# Altium PCB PJ1301-001-A1.PcbDoc (part 3 of 4)
Units mm, origin at the board's own origin, x right, y up, seen from the top; angles counter-clockwise.
Board outline 163.83 x 187.81 mm, 4 copper layers (Top Layer, GND, POWER, Bottom Layer); 436 components, 348 nets, 1620 pads, 1368 vias.
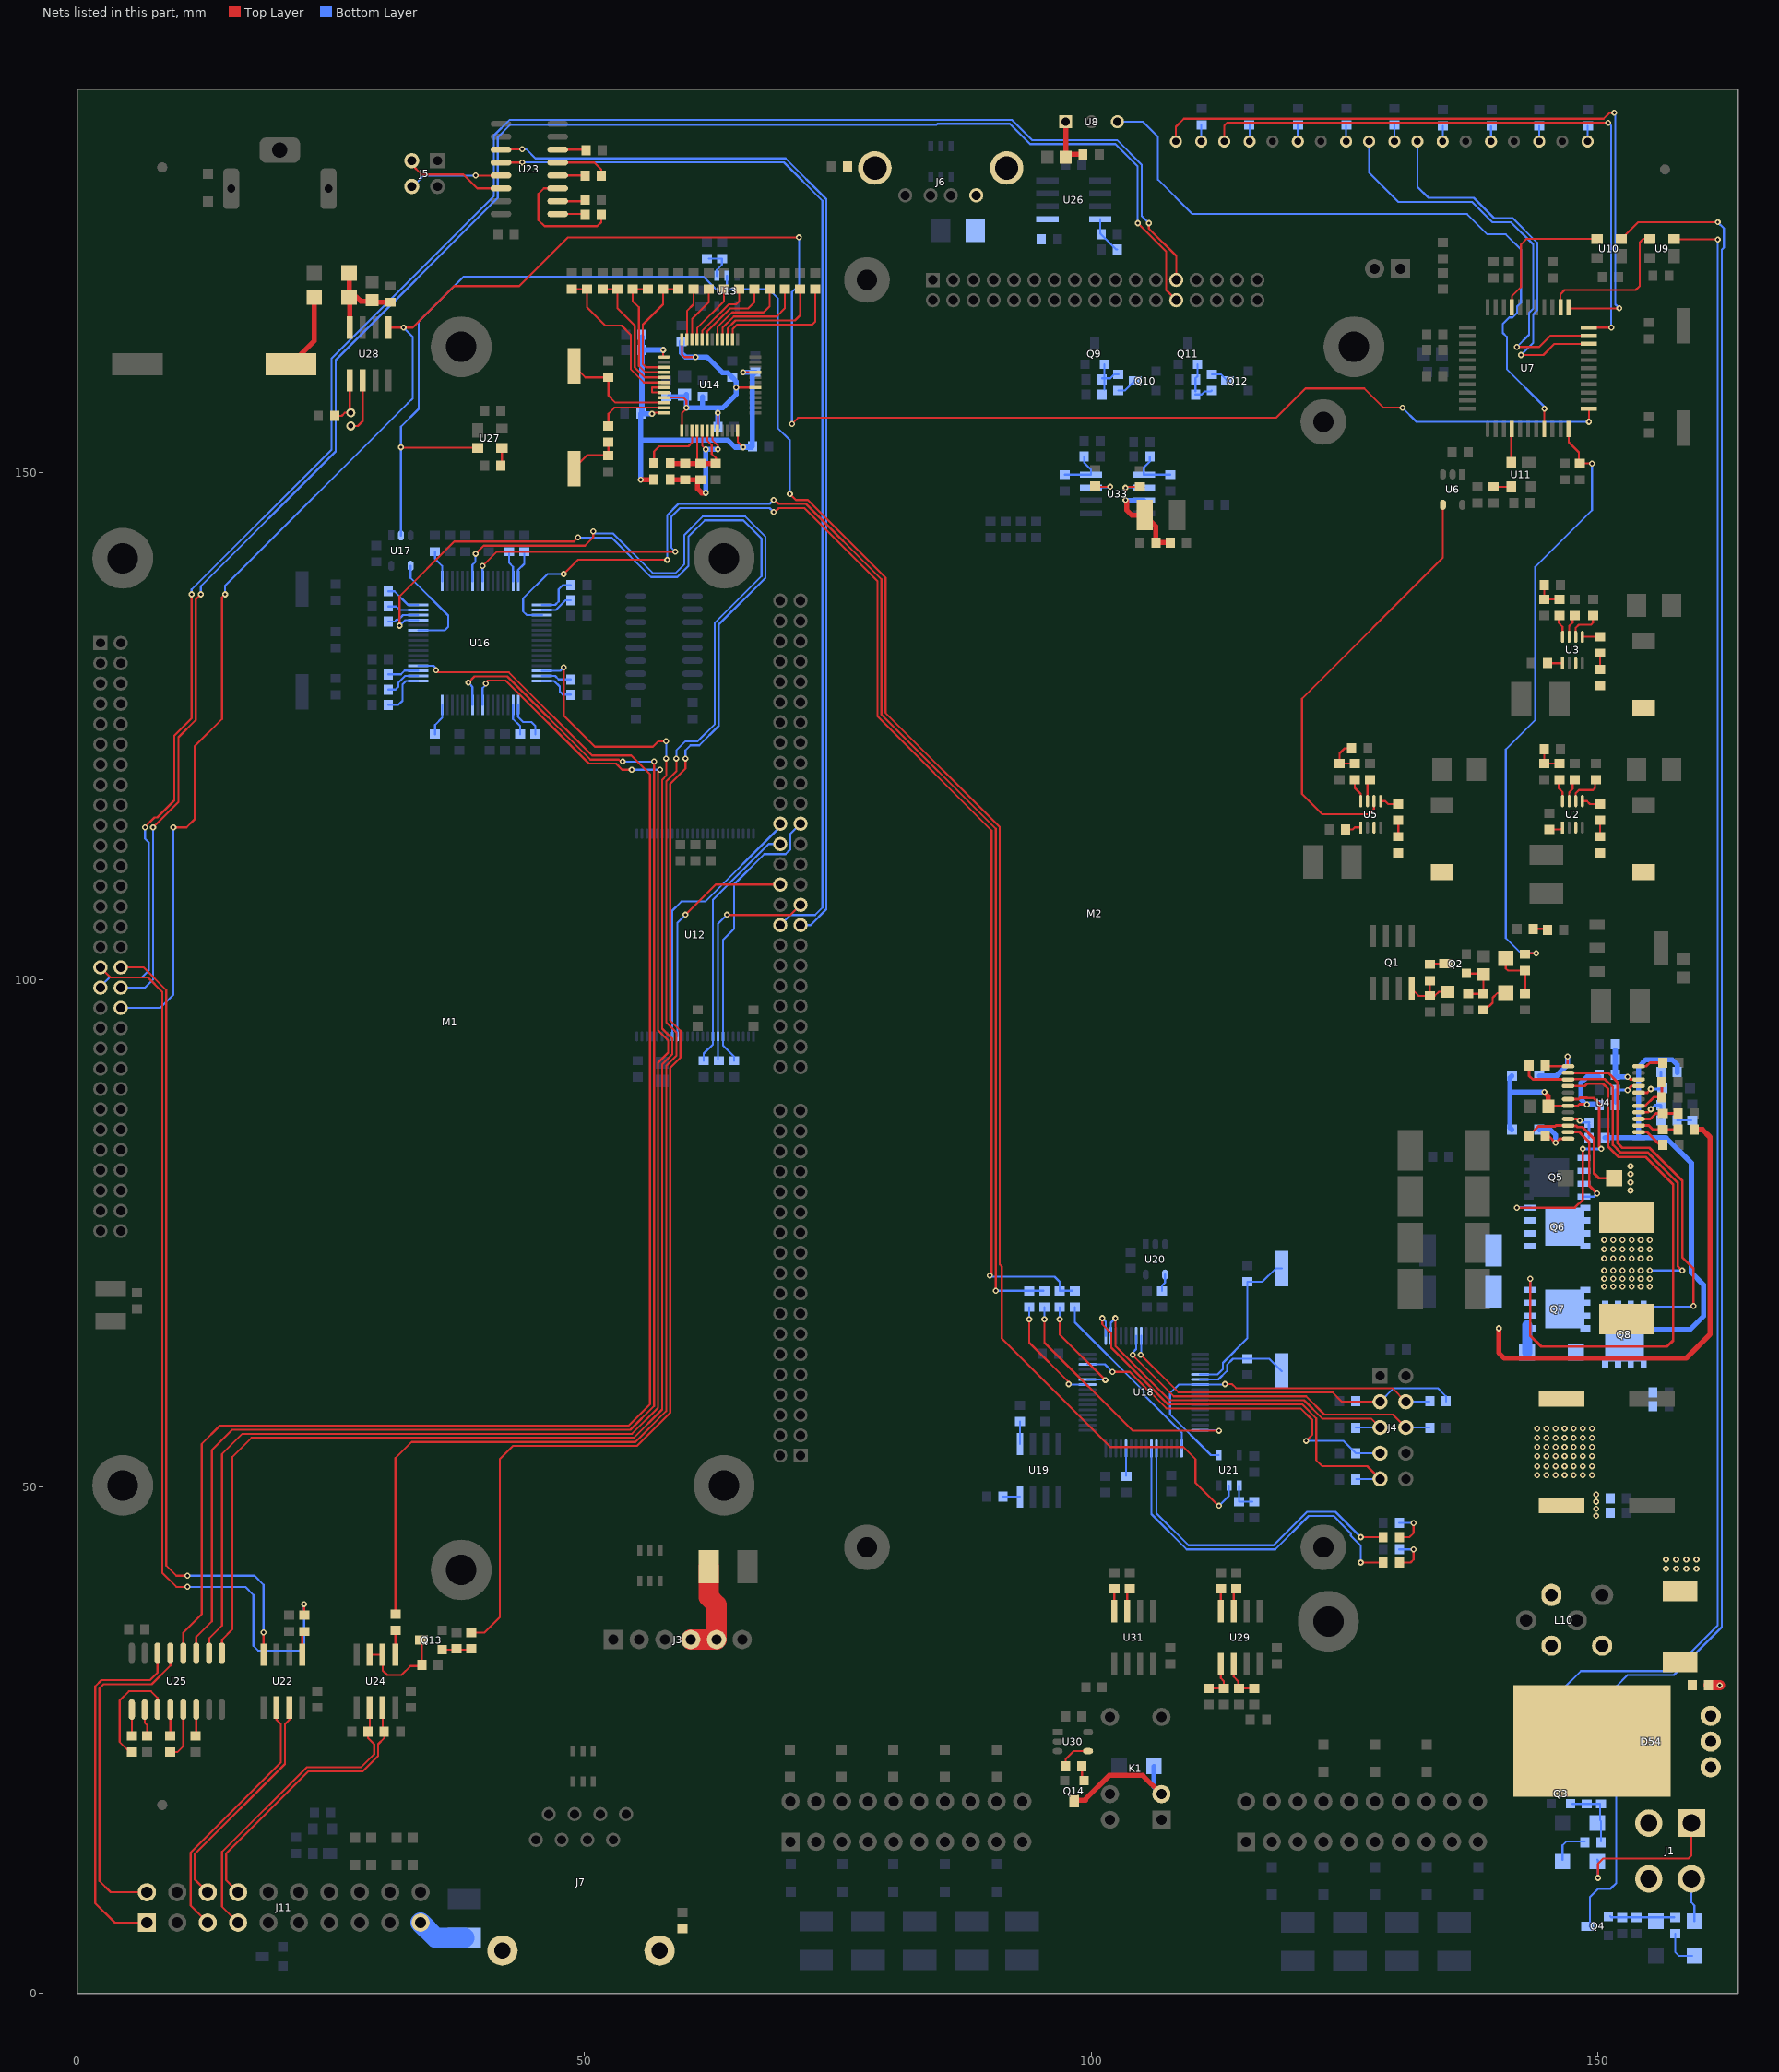
[diagram p5: the nets of this part, all layers, seen from the top]

## Via types
v1: diameter 0.6, hole 0.3, Top Layer to Bottom Layer, tented both sides, 1367 vias
v2: diameter 0.6, hole 0.3, Top Layer to Bottom Layer, 1 vias

## Nets (pads, with @x,y where several pads share a name; then routed paths per layer and width w, separated by ;. In a path a pad name is that pad's centre, name@x,y a point inside that pad or via, vN(x,y) a via of type N, cw(c..) or ccw(c..) an arc to the next point about the centre after c; other vN are vias at no path point) (continued)
I2C-SDA: M1.A38 U7.12 U28.5 | length 228
  Top Layer w0.2: v1(9.5,115) 10.8,115 11.6,115.8 11.6,123 14.3,125.7 14.3,137.7 v1(14.6,138) ; U28.5@30.705,164.3 33.1,164.3 37.2,168.4 43.6,168.4 48.4,173.2 v1(71.2,173.2) ; v1(70.5,154.8) 71.1,155.4 78,155.4 118.234,155.4 121.134,158.3 126.934,158.3 128.834,156.4 v1(130.7,156.4) ; v1(149.1,155) U7.12@149.1,156.3
  Bottom Layer w0.2: M1.A38@4.3,97.2 8.2,97.2 9.5,98.5 v1(9.5,115) ; v1(14.6,138) 14.6,138.834 32.617,156.851 ; v1(32.2,164.3) 33.1,163.4 33.1,157.3 32.634,156.834 ; v1(70.5,154.8) 70.5,167.8 71.2,168.5 v1(71.2,173.2) ; v1(130.7,156.4) 132.1,155 v1(149.1,155)
IGN: Q3.1 U9.2 | length 168.1
  Top Layer w0.2: U9.2@157.55,173 v1(161.8,173)
  Bottom Layer w0.2: Q3.1@146.535,20.732 146.535,30.035 148.3,31.8 157.3,31.8 161.8,36.3 v1(161.8,173)
IGN-SIG: U7.24 U9.3 | length 14.9
  Top Layer w0.2: U7.24@146.3,166.3 146.3,167.6 146.7,168 153.7,168 154.1,168.4 154.1,172.7 154.45,173.05 U9.3@155.1,173.05
INTVCC: C35.1 D8.1 D12.1 R32.1 R36.2 U4.19 | length 19.8
  Top Layer w0.2: C35.1@144.7,87.5 C35.1@144.75,87.55
  Top Layer w0.254: C35.1@145.15,87.55 U4.19@147.05,87.55 148,87.55 148.142,87.692 v1(148.9,87.692)
  Top Layer w0.508: v1(144.7,88.9) 144.7,88.857 145.1,88.457 C35.1@145.1,87.5
  Bottom Layer w0.5: D8.1@141.5,85.2 141.296,85.404 141.296,88.9 141.296,90.296 D12.1@141.5,90.5
  Bottom Layer w0.508: 141.296,88.9 v1(144.7,88.9) ; v1@148.8,87.7 148.3,88.2 148.3,89.8 148.9,90.4 R36.2@150.1,90.4 ; v1@148.9,87.7 R32.1@150,87.7
IR: U7.8 U8.3 | length 67.8
  Top Layer w0.2: U7.8@144.7,154.3 v1(144.7,156.3)
  Bottom Layer w0.2: U8.3@102.6,184.6 105.1,184.6 106.6,183.1 106.6,178.9 110,175.5 137.072,175.5 139.072,173.5 140.906,173.5 142.4,172.006 142.4,166.766 142,166.366 142,165.731 141.569,165.3 141.234,165.3 140.6,164.666 140.6,163.786 141,163.386 141,160.2 144.7,156.5 v1(144.7,156.3)
NAND-ALE: M1.B26 U12.17 | length 26.8
  Bottom Layer w0.2: U12.17@58.7,94.4 58.7,106.8 59.6,107.7 61.969,107.7 69.352,115.083 M1.B26@69.352,115.372
NAND-CE: M1.B24 R53.1 U12.9 | length 25.2
  Bottom Layer w0.2: R53.1@61.8,92 61.8,92.7 62.7,93.6 U12.9@62.7,94.4 62.7,107.866 68.206,113.372 M1.B24@69.352,113.372
NAND-CLE: M1.B20 U12.16 | length 22.9
  Top Layer w0.2: v1(60,106.4) 62.972,109.372 M1.B20@69.352,109.372
  Bottom Layer w0.2: U12.16@59.2,94.4 59.2,105.6 v1(60,106.4)
NAND-RDY: M1.B25 R55.1 U12.7 | length 28.2
  Bottom Layer w0.2: R55.1@64.8,92 64.8,92.4 63.7,93.5 U12.7@63.7,94.4 63.7,103.9 64.8,105 64.8,109.4 67.772,112.372 69.872,112.372 70.352,112.852 70.352,114.372 M1.B25@71.352,115.372
NAND-RE: M1.B17 R54.1 U12.8 | length 22.4
  Top Layer w0.2: v1(64.1,106.4) 64.128,106.372 70.352,106.372 M1.B17@71.352,107.372
  Bottom Layer w0.2: R54.1@63.2,92.1 U12.8@63.2,94.4 63.2,105.5 v1(64.1,106.4)
NetBT1_1: BT1.1 D28.2 | length 7.6
  Top Layer w0.5: BT1.1@21.1,160.7 23.4,163 D28.2@23.4,167.3
NetC1_1: C1.1 D1.2 J1.4 L10.2 | length 1.1
  Top Layer w1: C1.1@160.9,30.4 v1(162,30.4)
  other v1: 156.7,41.9 157.7,41.9 158.7,41.9 159.7,41.9 156.7,42.8 157.7,42.8 158.7,42.8 159.7,42.8
NetC1_2: C1.2 D1.1 D54.1 L10.1
NetC2_1: C2.1 Q1.4 R1.1 R3.2 | length 5.6
  Top Layer w0.2: Q1.4@131.605,99.1 132.305,98.4 R1.1@133.4,98.4 ; R3.2@133.4,99.9 R1.1@133.4,98.4 ; C2.1@135.2,98.8 134.3,98.8 133.9,98.4 R1.1@133.4,98.4
NetC11_2: C11.2 Q2.2 R5.1 R6.2 | length 5.1
  Top Layer w0.2: Q2.2@137,100.6 138.6,100.6 C11.2@138.7,100.5 R5.1@138.7,98.6 R6.2@137.2,98.6
NetC12_1: C12.1 D5.1 Q3.2 R7.1 R8.1 | length 6.3
  Bottom Layer w0.2: Q3.2@147.5,18.7 150.2,18.7 D5.1@150.2,17.071 ; R7.1@150.3,15 D5.1@150.3,16.971
NetC13_1: C13.1 D7.1 Q4.2 R9.1 R10.1 | length 6.3
  Bottom Layer w0.2: Q4.2@151.2,7.6 151.3,7.5 152.5,7.5 153.9,7.5 R9.1@157.5,7.5
NetC14_1: C14.1 L1.1 U2.3
NetC14_2: C14.2 R11.1 | length 1.6
  Top Layer w0.2: C14.2@150.2,114.1 R11.1@150.2,115.7
NetC17_2: C17.2 U2.1 | length 1.4
  Top Layer w0.2: C17.2@145.2,114.8 146.3,114.8 U2.1@146.5,115
NetC18_2: C18.2 U2.7 | length 2.2
  Top Layer w0.2: U2.7@147.15,117.6 147.15,118.45 147.5,118.8 C18.2@147.5,119.7
NetC24_1: C24.1 L2.1 U3.3
NetC24_2: C24.2 R17.1 | length 1.6
  Top Layer w0.2: C24.2@150.2,130.6 R17.1@150.2,132.2
NetC27_1: C27.1 D9.1 L3.1 Q5.1 Q5.2 Q5.3 Q6. Q6.5 Q6.6 Q6.7 Q6.8 U4.22 | length 13
  Top Layer w0.254: C27.1@143.2,84.6 144.119,85.519 145.782,85.519 145.863,85.6 U4.22@147.05,85.6 147.092,85.558 147.858,85.558 147.971,85.446 148.454,85.446 149.581,84.319 149.581,80.9 150.081,80.4 D9.1@151.6,80.4
  other v1: 150.6,72.5 151.5,72.5 152.4,72.5 153.3,72.5 154.2,72.5 155.1,72.5 150.6,73.4 151.5,73.4 152.4,73.4 153.3,73.4 154.2,73.4 155.1,73.4 150.6,74.3 151.5,74.3 152.4,74.3 153.3,74.3 154.2,74.3 155.1,74.3 153.2,79.2 153.2,80 153.2,80.8 153.2,81.6
NetC27_2: C27.2 D8.2 U4.24 | length 5.3
  Top Layer w0.254: C27.2@144.8,84.6 145.1,84.6 v1(145.8,83.9) 146.2,84.3 U4.24@147.05,84.3
  Bottom Layer w0.5: D8.2@144.2,85.2 145.3,85.2 145.8,84.7 v1(145.8,83.9)
NetC28_2: C28.2 U4.2 | length 2.9
  Top Layer w0.254: U4.2@154,84.95 154.85,84.95 156,83.8 C28.2@156.4,83.8
NetC29_2: C29.2 U3.1 | length 1.5
  Top Layer w0.2: C29.2@145,131.2 U3.1@146.5,131.2
NetC30_2: C30.2 U3.7 | length 2.2
  Top Layer w0.2: U3.7@147.15,133.8 147.15,134.85 147.5,135.2 C30.2@147.5,135.9
NetC31_1: C31.1 R24.2 U4.4 | length 4
  Top Layer w0.254: U4.4@154,86.25 155.15,86.25 155.7,86.8 C31.1@156.4,86.8 R24.2@157.8,86.8
NetC31_2: C31.2 R22.2 U4.3 | length 4
  Top Layer w0.254: U4.3@154,85.6 155,85.6 155.4,85.2 C31.2@156.4,85.2 R22.2@157.8,85.2
NetC32_2: C32.2 R25.1 | length 1.4
  Bottom Layer w0.2: R25.1@157.8,86.1 C32.2@159.2,86.1
NetC33_2: C33.2 R23.1 U4.21 | length 3.5
  Top Layer w0.254: U4.21@147.05,86.25 148.05,86.25 v1(148.2,86.1)
  Bottom Layer w0.254: v1(148.2,86.1) 148.4,85.9 C33.2@149.1,85.9 ; R23.1@149.1,84.4 C33.2@149.1,85.7
NetC34_1: C34.1 R25.2 U4.5 | length 3.7
  Top Layer w0.254: U4.5@154,86.9 154.9,86.9 v1(155.2,87.2)
  Bottom Layer w0.254: v1(155.2,87.2) 155.6,87.6 C34.1@156.2,87.6 R25.2@156.2,86.4
NetC36_1: C36.1 L4.1 U5.3
NetC36_2: C36.2 R28.1 | length 1.6
  Top Layer w0.2: C36.2@130.3,114.1 R28.1@130.3,115.7
NetC39_2: C39.2 U5.1 | length 1.6
  Top Layer w0.2: C39.2@125.1,114.8 125.8,114.8 126,115 U5.1@126.6,115
NetC40_1: C40.1 D11.2 L3.2 Q7. Q7.5 Q7.6 Q7.7 Q7.8 Q8.1 Q8.2 Q8.3 U4.15 | length 35.4
  Top Layer w0.254: C40.1@143.2,91.5 143.2,90.5 143.55,90.15 U4.15@147.05,90.15 147.081,90.181 150.661,90.181 151.454,89.388 151.454,83.688 152.188,82.954 154.888,82.954 157.854,79.988 157.854,71.746 v1(158.3,71.3)
  Bottom Layer w0.254: v1(155.1,71.3) v1(158.3,71.3)
  other v1: 150.6,69.7 151.5,69.7 152.4,69.7 153.3,69.7 154.2,69.7 155.1,69.7 150.6,70.5 151.5,70.5 152.4,70.5 153.3,70.5 154.2,70.5 155.1,70.5 150.6,71.3 151.5,71.3 152.4,71.3 153.3,71.3 154.2,71.3
NetC40_2: C40.2 D12.2 U4.13 | length 7.3
  Top Layer w0.254: C40.2@144.8,91.5 144.85,91.45 U4.13@147.05,91.45 147,91.5 v1(147,92.4)
  Bottom Layer w0.5: D12.2@144.2,90.5 145.9,90.5 147,91.6 v1(147,92.4)
NetC41_2: C41.2 U5.7 | length 2.1
  Top Layer w0.2: U5.7@127.25,117.6 127.25,119.65 C41.2@127.3,119.7
NetC42_1: C42.1 R36.1 R38.1 U4.10 | length 5
  Top Layer w0.254: v1(152.9,90.4) 153.15,90.15 U4.10@154,90.15
  Bottom Layer w0.508: 151.7,93 151.7,91.7 151.7,90.4 v1(152.9,90.4)
NetC43_2: C43.2 U4.12 | length 2.5
  Top Layer w0.254: U4.12@154,91.45 154.75,91.45 155.1,91.8 C43.2@156.4,91.8
NetC45_2: C45.2 R52.2 U8.1 | length 5.2
  Top Layer w0.5: U8.1@97.5,184.6 C45.2@97.5,181.1 97.8,181.4 R52.2@99.1,181.4
NetC53_1: C53.1 U11.3 | length 1.7
  Top Layer w0.2: C53.1@139.7,148.6 U11.3@141.45,148.6
NetC64_2: C64.2 C65.2 C66.2 C67.2 C68.2 L5.1 U14.9 U14.13 U14.20 U14.30 U14.48 | length 32.7
  Top Layer w0.2: U14.9@57.9,157.4 59.8,157.4 60.1,157.1 v1(60.1,156.4) 60.1,156.3 59.65,155.85 U14.13@59.65,154.15 ; U14.48@59.65,163.15 59.65,161.65 59.9,161.4 v1(61,161.4) ; U14.20@63.2,154.2 v1(63.2,155.9) ; v1(65,158.4) U14.30@66.9,158.4
  Bottom Layer w0.5: C67.2@58.4,157.5 C68.2@59.9,157.5 ; C66.2@59.6,162.9 59.6,161.8 60,161.4 v1(61,161.4) 62.1,161.4 63.65,159.85 64.15,159.85 C65.2@64.6,159.4 65,159 v1(65,158.4) 65,157.7 63.7,156.4 ; C68.2@60.1,157.7 v1(60.1,156.4) 61.7,156.4 ; L5.1@61.7,157.5 61.7,156.4 ; C64.2@63.2,154.5 63.2,156.4 63.7,156.4 ; 61.7,156.4 63.7,156.4
NetC69_2: C69.2 R57.2 Y2.2 | length 5.2
  Top Layer w0.2: Y2.2@49,150.4 50.3,151.7 C69.2@52.4,151.7 R57.2@52.4,153
NetC70_2: C70.2 U14.10 Y2.1 | length 11.5
  Top Layer w0.2: Y2.1@49,160.521 50.121,159.4 C70.2@52.4,159.4 52.4,157.6 53.1,156.9 U14.10@57.9,156.9
NetC71_2: C71.2 C73.2 C75.2 C76.2 C77.2 L6.2 U14.1 U14.12 U14.24 U14.33 | length 43.7
  Top Layer w0.2: v1(56.7,155.8) 56.7,155.7 56.9,155.9 U14.12@57.9,155.9 ; v1(57.8,162.1) 57.8,161.5 U14.1@57.9,161.4 ; U14.24@65.15,154.15 65.15,153.05 v1(65.7,152.5) ; v1(65.7,159.9) U14.33@66.9,159.9
  Top Layer w0.508: v1(55.6,149.3) L6.2@56.9,149.3
  Bottom Layer w0.5: C75.2@55.7,155.8 v1(56.7,155.8) ; v1(65.7,159.9) C77.2@66.9,159.9
  Bottom Layer w0.508: v1(55.6,149.3) 55.6,153.2 ; C75.2@55.6,155.8 55.6,153.2 ; C75.2@55.7,155.8 C73.2@55.7,162.1 ; C71.2@55.7,163.4 C73.2@55.7,162.1 ; v1(57.8,162.1) C73.2@55.7,162.1 ; C77.2@66.9,159.9 66.6,159.6 C76.2@66.6,152.6 66.5,152.5 v1(65.7,152.5) 64.9,152.5 64.2,153.2 55.6,153.2
NetC72_1: C72.1 C74.1 L7.1 R58.1 U14.16 U14.18 | length 10.7
  Top Layer w0.2: C72.1@61.15,150.95 U14.16@61.15,154.15 ; U14.18@62.15,154.15 62.15,153.15 62.6,152.7 62.6,151.85 63,151.45 L7.1@63,150.9 ; 62.5,150.9 L7.1@62.6,151
  Top Layer w0.5: R58.1@58.5,150.9 60.95,150.9 ; C72.1@61.2,150.9 62.5,150.9
NetC72_2: C72.2 C74.2 L6.1 U14.17 U14.19 | length 14.1
  Top Layer w0.2: U14.17@61.65,154.15 61.65,152.65 v1(62,152.3) ; U14.19@62.65,154.15 62.65,153.216 63.2,152.666 v1(63.2,152.3)
  Top Layer w0.5: L6.1@58.5,149.3 61.2,149.3 61.2,148.4 61.6,148 v1(62,148)
  Bottom Layer w0.5: v1(62,148) v1(62,152.3) v1(63.2,152.3)
NetC87_2: C87.2 Q9.1 R95.1 R96.2 | length 4.3
  Bottom Layer w0.2: R95.1@101.1,159.3 R95.1@101.305,159.3 ; 101.305,158.205 R95.1@101.305,159.3 ; Q9.1@101.305,160.7 R95.1@101.305,159.3 ; R96.2@102.7,159.7 102.3,159.7 101.9,159.3 R95.1@101.305,159.3
NetC88_2: C88.2 Q11.1 R98.1 R99.2 | length 4.5
  Bottom Layer w0.2: C88.2@110.3,157.7 110.9,157.7 111.2,158 111.8,158 R99.2@111.9,158.1 ; C88.2@110.3,158 R98.1@110.3,159.2 110.3,159.3 110.5,159.5 Q11.1@110.5,160.7
NetC102_1: C102.1 U23.1 | length 2.7
  Top Layer w0.2: U23.1@47.4,175.5 C102.1@50.1,175.5
NetC102_2: C102.2 U23.3 | length 12.1
  Top Layer w0.2: U23.3@47.4,178.04 46.04,178.04 45.5,177.5 45.5,174.9 46.1,174.3 51.3,174.3 51.7,174.7 C102.2@51.7,175.5
NetC103_1: C103.1 U23.2 | length 2.8
  Top Layer w0.2: U23.2@47.4,176.77 49.97,176.77 C103.1@50.1,176.9
NetC104_1: C104.1 U23.6 | length 2.8
  Top Layer w0.2: U23.6@47.4,181.85 50.15,181.85 C104.1@50.2,181.8
NetC105_1: C105.1 U23.4 | length 2.7
  Top Layer w0.2: U23.4@47.4,179.31 50.09,179.31 C105.1@50.1,179.3
NetC105_2: C105.2 U23.5 | length 5.2
  Top Layer w0.2: U23.5@47.4,180.58 51.02,180.58 51.7,179.9 C105.2@51.7,179.3
NetC108_1: C108.1 U25.1 | length 2.6
  Top Layer w0.2: C108.1@5.4,25.4 U25.1@5.4,28
NetC108_2: C108.2 U25.3 | length 11.3
  Top Layer w0.2: C108.2@5.4,23.8 5.2,23.8 4.2,24.8 4.2,28.9 5.1,29.8 7.3,29.8 7.94,29.16 U25.3@7.94,28
NetC109_1: C109.1 U25.2 | length 2.7
  Top Layer w0.2: U25.2@6.67,28 6.67,26.73 6.9,26.5 C109.1@6.9,25.4
NetC110_1: C110.1 U25.6 | length 2.6
  Top Layer w0.2: C110.1@11.7,25.4 11.75,25.45 U25.6@11.75,28
NetC111_1: C111.1 U25.4 | length 2.6
  Top Layer w0.2: C111.1@9.21,25.41 U25.4@9.21,28
NetC111_2: C111.2 U25.5 | length 5.1
  Top Layer w0.2: C111.2@9.2,23.8 9.9,23.8 10.48,24.38 U25.5@10.48,28
NetC114_1: C114.1 C116.1 J6.1 U26.5
NetC115_1: C115.1 U27.3 | length 1.5
  Top Layer w0.2: C115.1@41.9,150.9 U27.3@41.9,152.45
NetC117_1: C117.1 C118.1 D27.1 D28.1 U28.8 | length 9.3
  Top Layer w0.5: D27.1@26.829,169.5 D28.1@26.829,167.3 27.6,167.3 28,166.9 29,166.9 C117.1@29.1,167 ; U28.8@26.895,164.3 D28.1@26.895,167.234 ; C117.1@29.1,166.8 C118.1@30.8,166.8
NetC119_1: C119.1 U28.1 Y5.2 | length 4.9
  Top Layer w0.2: C119.1@25.4,155.6 26.1,155.6 26.4,155.9 Y5.2@26.895,155.9 ; U28.1@26.895,159.1 Y5.2@26.895,155.9 ; Y5.2@27,155.9 Y5.2@26.895,155.9
NetC120_2: C120.2 R130.1 U29.1 | length 3.9
  Top Layer w0.2: C120.2@111.7,30.1 R130.1@113.1,30.1 113.1,30.795 112.795,31.1 U29.1@112.795,32.5
NetC121_2: C121.2 R129.1 U29.2 | length 4
  Top Layer w0.2: U29.2@114.065,32.5 114.065,31.235 114.5,30.8 114.5,30.1 C121.2@115.9,30.1
NetC127_2: C127.2 C128.2 R140.1 U33.3 | length 9.2
  Top Layer w0.5: v1(103.4,147.3) 103.5,147.2 103.5,146.3 104,145.8 C127.2@105.3,145.8 106.4,144.7 C128.2@106.4,143.2 ; C128.2@106.4,143.1 R140.1@107.7,143.1
  Bottom Layer w0.5: v1(103.4,147.3) 103.435,147.265 U33.3@105.2,147.265
NetC129_1: C129.1 U33.7 | length 3.5
  Top Layer w0.2: C129.1@100.4,148.7 100.5,148.6 v1(101.9,148.6)
  Bottom Layer w0.2: U33.7@100,148.535 101.835,148.535 v1(101.9,148.6)
NetC130_1: C130.1 U33.2 | length 3.3
  Top Layer w0.2: v1(103.4,148.5) 103.5,148.6 C130.1@104.8,148.6
  Bottom Layer w0.2: v1(103.4,148.5) 103.435,148.535 U33.2@105.2,148.535
NetD2_1: D2.1 R2.1 | length 1.3
  Top Layer w0.2: R2.1@143.6,105 D2.1@144.9,105
NetD3_1: D3.1 R5.2 | length 3.2
  Top Layer w0.2: R5.2@138.7,97 138.9,97 139.6,97.7 139.6,98.2 140.071,98.671 D3.1@140.9,98.671
NetD3_2: D3.2 R156.2 R157.2 | length 5.3
  Top Layer w0.2: D3.2@140.9,102.1 140.9,101.1 141.1,100.9 R157.2@142.8,100.9 R156.2@142.8,98.6
NetD4_1: D4.1 J1.1 | length 14
  Top Layer w0.2: 150,11.7 150,12.8 150.5,13.3 158.9,13.3 159.174,13.574 J1.1@159.174,15.476
  Bottom Layer w0.2: D4.1@149.929,13.2 150,13.129 150,11.7
  other v1: 150,11.4
NetD4_2: D4.2 R7.2 | length 3.8
  Bottom Layer w0.2: D4.2@146.5,13.2 146.5,14.6 146.9,15 R7.2@148.7,15
NetD6_1: D6.1 J1.2 | length 4.3
  Bottom Layer w0.2: J1.2@159.174,11.276 159.174,9 159.5,8.674 D6.1@159.5,7.129
NetD6_2: D6.2 R9.2 | length 3.7
  Bottom Layer w0.2: R9.2@157.6,5.9 157.6,4.1 158,3.7 D6.2@159.3,3.7
NetD10_1: D10.1 R30.2 U4.8 | length 4.2
  Top Layer w0.254: U4.8@154,88.85 154.85,88.85 v1(155.2,89.2)
  Bottom Layer w0.254: v1(155.2,89.2) 156.25,89.2 D10.1@156.35,89.3 156.2,89.45 R30.2@156.2,90.9
NetD11_1: D11.1 Q6.1 Q6.2 Q6.3 Q7.1 Q7.2 Q7.3 R22.1 R29.2 R31.2 | length 48.5
  Top Layer w0.508: v1(140.2,65.6) 140.2,63.2 140.746,62.654 158.678,62.654 161.046,65.022 161.046,84.454 160.3,85.2 R22.1@159.4,85.2
  Bottom Layer w1: D11.1@143,63.2 143,65.9
NetD13_1: D13.1 R40.2 | length 1.5
  Bottom Layer w0.2: D13.1@144.204,182.661 R40.2@144.204,184.197
NetD14_1: D14.1 R41.2 | length 1.5
  Bottom Layer w0.2: D14.1@139.441,182.661 R41.2@139.441,184.141
NetD15_1: D15.1 R42.2 | length 1.5
  Bottom Layer w0.2: D15.1@134.679,182.661 R42.2@134.679,184.179
NetD16_1: D16.1 R43.2 | length 1.6
  Bottom Layer w0.2: D16.1@129.916,182.661 R43.2@129.916,184.284
NetD17_1: D17.1 R44.2 | length 1.6
  Bottom Layer w0.2: D17.1@115.628,182.661 R44.2@115.628,184.272
NetD18_1: D18.1 R45.2 | length 1.6
  Bottom Layer w0.2: D18.1@110.866,182.661 R45.2@110.866,184.266
NetD19_1: D19.1 R46.2 | length 1.5
  Bottom Layer w0.2: D19.1@148.966,182.661 R46.2@148.966,184.166
NetD20_1: D20.1 R47.2 | length 1.6
  Bottom Layer w0.2: D20.1@120.391,182.661 R47.2@120.391,184.291
NetD21_1: D21.1 R48.2 | length 1.6
  Bottom Layer w0.2: D21.1@125.153,182.661 R48.2@125.153,184.253
NetD23_1: D23.1 R101.2 | length 4
  Top Layer w0.2: D23.1@130.4,45 131.4,45 131.8,45.4 v1(131.8,46.4)
  Bottom Layer w0.2: R101.2@130.4,46.4 v1(131.8,46.4)
NetD24_1: D24.1 R102.2 | length 3.9
  Top Layer w0.2: D24.1@130.4,42.5 131.5,42.5 131.8,42.8 v1(131.8,43.8)
  Bottom Layer w0.2: R102.2@130.4,43.8 v1(131.8,43.8)
NetD40_2: D40.2 K1.2 Q14.1 | length 13.5
  Top Layer w0.5: Q14.1@98.335,19.068 99.468,19.068 99.468,19.177 101.791,21.5 105.1,21.5 K1.2@106.94,19.66
  Bottom Layer w0.5: D40.2@106.2,22.4 106.2,20.4 K1.2@106.94,19.66
NetD54_2: D54.2 J1.3
NetF2_1: F2.1 J3.4 J3.5 | length 10.1
  Top Layer w2: J3.4@60.52,34.9 J3.5@63.06,34.9 63.06,38.34 62.3,39.1 F2.1@62.3,42.1
NetF13_2: F13.2 J11.19 | length 4.9
  Bottom Layer w2: J11.19@33.883,6.981 35.364,5.5 F13.2@38.2,5.5
NetJ5_3: J5.3 U23.14 | length 10.1
  Top Layer w0.2: J5.3@33.014,180.762 33.014,180.386 34,179.4 38.1,179.4 39.46,178.04 U23.14@41.812,178.04
NetJ5_4: J5.4 U23.13 | length 9.2
  Top Layer w0.2: v1(39.3,179.3) 41.802,179.3 U23.13@41.812,179.31
  Bottom Layer w0.2: J5.4@33.014,178.222 33.122,178.222 34.2,179.3 v1(39.3,179.3)
NetJ6_5: J6.5 J6.6 L8.1
NetJ7_9: J7.9 J7.10 L9.1
NetQ2_1: Q2.1 R3.1 | length 1.6
  Top Layer w0.2: R3.1@133.4,101.5 133.465,101.565 Q2.1@134.968,101.565
NetQ5_4: Q5.4 U4.23 | length 9.3
  Top Layer w0.254: U4.23@147.05,84.95 148.15,84.95 149.127,83.973 149.127,79.673 v1(149.9,78.9)
  Bottom Layer w0.254: Q5.4@148.6,78.59 149.59,78.59 v1(149.9,78.9)
NetQ6_4: Q6.4 U4.18 | length 22.8
  Top Layer w0.254: v1(142,77.5) 147.7,77.5 148.5,78.3 v1(148.5,83.3) ; U4.18@147.05,88.2 148.1,88.2 148.227,88.327 148.91,88.327 148.918,88.319 149.581,88.319 150.1,87.8 150.1,83.5 v1(150.3,83.3)
  Bottom Layer w0.254: v1(142,77.5) 142.01,77.51 Q6.4@143.3,77.51 ; v1(148.5,83.3) v1(150.3,83.3)
NetQ7_4: Q7.4 U4.16 | length 54.8
  Top Layer w0.254: v1(143.3,70.5) 143.3,64.9 144.4,63.8 156.8,63.8 157.4,64.4 157.4,79.8 154.7,82.5 152,82.5 151,83.5 151,89.2 150.473,89.727 148.94,89.727 148.713,89.5 U4.16@147.05,89.5
  Bottom Layer w0.254: Q7.4@143.3,69.41 v1(143.3,70.5)
NetQ8_4: Q8.4 U4.14 | length 36.9
  Top Layer w0.254: U4.14@147.05,90.8 151,90.8 151.908,89.892 151.908,83.876 152.376,83.408 155.076,83.408 158.308,80.176 158.308,72.6 159.4,71.508 v1(159.4,67.8)
  Bottom Layer w0.254: Q8.4@154.51,67.7 159.3,67.7 v1(159.4,67.8)
NetQ10_1: Q10.1 R96.1 | length 2
  Bottom Layer w0.2: R96.1@102.7,158.1 103.333,158.1 Q10.1@104.268,159.035
NetQ12_1: Q12.1 R99.1 | length 1.8
  Bottom Layer w0.2: R99.1@111.9,159.7 112.803,159.7 Q12.1@113.468,159.035
NetQ13_1: Q13.1 R123.2 U24.2 U24.3 | length 9.8
  Top Layer w0.2: U24.3@28.865,33.4 U24.2@30.135,33.4 30.135,31.865 30.6,31.4 32,31.4 32.9,32.3 33.9,32.3 R123.2@34,32.4 34,34.833 Q13.1@33.968,34.865
NetQ13_2: Q13.2 R125.2 R128.1 | length 2.7
  Top Layer w0.2: Q13.2@36,33.9 38.6,33.9 R125.2@38.7,34
NetQ14_2: Q14.2 R135.1 | length 1.1
  Top Layer w0.2: Q14.2@99.1,21.3 R135.1@99.1,22.4
NetR11_2: R11.2 U2.5 | length 1.9
  Top Layer w0.2: U2.5@148.45,117.6 148.9,117.6 149.2,117.3 R11.2@150.2,117.3
NetR12_1: R12.1 U2.6 | length 3.7
  Top Layer w0.2: U2.6@147.8,117.6 147.8,118.4 148.1,118.7 149.5,118.7 149.7,118.9 R12.1@149.7,119.7
NetR13_1: R13.1 R14.2 R15.1 | length 2.8
  Top Layer w0.2: R14.2@144.7,122.7 R15.1@144.7,121.3 R13.1@146.1,121.3
NetR13_2: R13.2 U2.8 | length 2.3
  Top Layer w0.2: R13.2@146.1,119.7 146.1,118.9 146.5,118.5 U2.8@146.5,117.6
NetR17_2: R17.2 U3.5 | length 1.7
  Top Layer w0.2: U3.5@148.45,133.8 R17.2@150.2,133.8
NetR18_1: R18.1 U3.6 | length 3.5
  Top Layer w0.2: U3.6@147.8,133.8 147.8,134.7 148.1,135 149.3,135 149.5,135.2 R18.1@149.5,135.9
NetR19_1: R19.1 R20.2 R21.1 | length 2.8
  Top Layer w0.2: R20.2@144.7,138.9 R21.1@144.7,137.5 R19.1@146.1,137.5
NetR19_2: R19.2 U3.8 | length 2.3
  Top Layer w0.2: R19.2@146.1,135.9 146.1,135.2 146.5,134.8 U3.8@146.5,133.8
NetR26_2: R26.2 R27.1 U4.6 | length 3.8
  Top Layer w0.254: U4.6@154,87.55 154.65,87.55 155.5,88.4 R26.2@156.3,88.4 R27.1@156.3,89.5
NetR28_2: R28.2 U5.5 | length 1.9
  Top Layer w0.2: U5.5@128.55,117.6 129,117.6 129.3,117.3 R28.2@130.3,117.3
NetR32_2: R32.2 R35.2 U4.9 | length 3.8
  Top Layer w0.254: v1(152.9,89.1) 153.3,89.5 U4.9@154,89.5
  Bottom Layer w0.254: R32.2@151.7,87.8 R35.2@151.7,89.1 v1(152.9,89.1)
NetR33_1: R33.1 R34.2 R37.1 | length 3.7
  Top Layer w0.2: R37.1@124.5,121.3 124.5,122.3 125,122.8 R34.2@125.7,122.8 ; R37.1@124.7,121.3 R33.1@126,121.3
NetR33_2: R33.2 U5.8 | length 2.3
  Top Layer w0.2: R33.2@126,119.7 126,118.9 126.6,118.3 U5.8@126.6,117.6
NetR56_2: R56.2 U14.47 | length 5.2
  Top Layer w0.2: U14.47@60.15,163.15 60.15,165.95 60.8,166.6 R56.2@60.8,168.1
NetR57_1: R57.1 U14.11 | length 6.9
  Top Layer w0.2: R57.1@52.4,154.6 52.4,155.8 53,156.4 U14.11@57.9,156.4
NetR58_2: R58.2 U14.15 | length 6.5
  Top Layer w0.2: R58.2@56.9,150.9 56.9,152.1 57.4,152.6 60.3,152.6 60.65,152.95 U14.15@60.65,154.15
NetR59_1: R59.1 R152.1 U14.6 | length 16
  Top Layer w0.2: R59.1@48.8,168.1 R152.1@50.3,168.1 50.3,166.3 52.1,164.5 53.7,164.5 54.6,163.6 54.6,160.203 55.903,158.9 U14.6@57.9,158.9
NetR60_1: R60.1 R153.1 U14.5 | length 13.2
  Top Layer w0.2: R60.1@51.825,168.1 R153.1@53.3,168.1 53.3,166.2 55,164.5 55,160.369 55.969,159.4 U14.5@57.9,159.4
NetR61_1: R61.1 R154.1 U14.4 | length 12.1
  Top Layer w0.2: R154.1@56.3,168.1 R61.1@54.8,168.1 54.8,166.9 55.4,166.3 55.4,160.534 56.034,159.9 U14.4@57.9,159.9
NetR62_1: R62.1 R155.1 U14.3 | length 12
  Top Layer w0.2: U14.3@57.9,160.4 56.1,160.4 55.8,160.7 55.8,164.6 57.8,166.6 R62.1@57.8,168.1 R155.1@59.3,168.1
NetR63_1: R63.1 U14.38 | length 12.7
  Top Layer w0.2: U14.38@64.65,163.15 64.65,164.15 65.1,164.6 72.5,164.6 72.8,164.9 R63.1@72.8,168.1
NetR64_1: R64.1 U14.40 | length 10
  Top Layer w0.2: U14.40@63.65,163.15 63.65,164.281 64.769,165.4 69,165.4 69.8,166.2 R64.1@69.8,168.1
NetR65_1: R65.1 U14.43 | length 7.9
  Top Layer w0.2: U14.43@62.15,163.15 62.15,163.913 64.437,166.2 66.2,166.2 66.8,166.8 R65.1@66.8,168.1
NetR66_1: R66.1 U14.45 | length 6
  Top Layer w0.2: U14.45@61.15,163.15 61.15,164.25 63.8,166.9 R66.1@63.8,168.1
NetR67_2: R67.2 R68.2 U13.1 | length 3.2
  Bottom Layer w0.2: R67.2@62.3,171.1 R68.2@63.6,171.1 63.6,170.5 63.1,170 U13.1@63.1,169.4
NetR69_1: R69.1 U14.39 | length 11.3
  Top Layer w0.2: U14.39@64.15,163.15 64.15,164.216 64.934,165 70.8,165 71.3,165.5 R69.1@71.3,168.1
NetR70_1: R70.1 U14.41 | length 8.9
  Top Layer w0.2: U14.41@63.15,163.15 63.15,164.347 64.603,165.8 67.7,165.8 68.3,166.4 R70.1@68.3,168.1
NetR71_1: R71.1 U14.44 | length 6.9
  Top Layer w0.2: U14.44@61.65,163.15 61.65,163.978 64.272,166.6 65,166.6 65.3,166.9 R71.1@65.3,168.1
NetR72_1: R72.1 U14.46 | length 5.6
  Top Layer w0.2: U14.46@60.65,163.15 60.65,165.15 62.3,166.8 R72.1@62.3,168.1
NetR74_1: R74.1 U16.2 | length 3.2
  Bottom Layer w0.2: U16.2@43,127.1 43,125.7 43.7,125 R74.1@43.7,124.2
NetR75_1: R75.1 U16.1 | length 4.1
  Bottom Layer w0.2: U16.1@43.5,127.1 43.5,125.9 44,125.4 44.8,125.4 45.2,125 R75.1@45.2,124.2
NetR76_1: R76.1 U16.64 | length 3.7
  Bottom Layer w0.2: U16.64@45.85,129.45 47.05,129.45 47.6,128.9 47.6,128.4 47.9,128.1 R76.1@48.7,128.1
NetR77_1: R77.1 U16.63 | length 3
  Bottom Layer w0.2: U16.63@45.85,129.95 47.15,129.95 47.5,129.6 R77.1@48.7,129.6
NetR78_1: R78.1 U16.16 | length 3.2
  Bottom Layer w0.2: R78.1@35.3,124.2 35.3,125.1 36,125.8 U16.16@36,127.1
NetR79_1: R79.1 U16.17 | length 4.9
  Bottom Layer w0.2: R79.1@30.7,127.1 31.7,127.1 32.1,127.5 32.1,129.1 32.45,129.45 U16.17@33.65,129.45
NetR80_1: R80.1 U16.18 | length 3.7
  Bottom Layer w0.2: R80.1@30.7,128.6 31.4,128.6 31.7,128.9 31.7,129.3 32.35,129.95 U16.18@33.65,129.95
NetR81_1: R81.1 U16.19 | length 3.1
  Bottom Layer w0.2: R81.1@30.7,130.1 31.934,130.1 32.305,130.47 33.63,130.47 U16.19@33.65,130.45
NetR82_1: R82.1 U16.33 | length 3.2
  Bottom Layer w0.2: R82.1@35.3,142.2 35.3,141.5 36,140.8 U16.33@36,139.3
NetR83_1: R83.1 U16.32 | length 3.5
  Bottom Layer w0.2: R83.1@30.7,138.3 31.3,138.3 32.65,136.95 U16.32@33.65,136.95
NetR84_1: R84.1 U16.31 | length 3.1
  Bottom Layer w0.2: R84.1@30.7,136.8 31.5,136.8 31.85,136.45 U16.31@33.65,136.45
NetR85_1: R85.1 U16.30 | length 3.2
  Bottom Layer w0.2: R85.1@30.7,135.3 31.3,135.3 31.5,135.5 31.7,135.5 32.15,135.95 U16.30@33.65,135.95
NetR86_1: R86.1 U16.47 | length 3.1
  Bottom Layer w0.2: R86.1@42.6,142.2 42.6,141.1 43,140.7 U16.47@43,139.3
NetR91_1: R91.1 U16.48 | length 3.1
  Bottom Layer w0.2: U16.48@43.5,139.3 43.5,140.4 44.1,141 R91.1@44.1,142.2
NetR92_1: R92.1 U16.49 | length 4.4
  Bottom Layer w0.2: U16.49@45.85,136.95 47.15,136.95 47.5,137.3 47.5,138.5 47.9,138.9 R92.1@48.7,138.9
NetR93_1: R93.1 U16.50 | length 3.2
  Bottom Layer w0.2: U16.50@45.85,136.45 47.216,136.45 48.166,137.4 R93.1@48.7,137.4
NetR103_2: R103.2 U18.28 | length 2.7
  Bottom Layer w0.2: R103.2@103.45,51.05 U18.28@103.45,53.75
NetR104_1: R104.1 U19.1 | length 2.2
  Bottom Layer w0.2: U19.1@92.995,54.2 R104.1@92.995,56.395
NetR105_2: R105.2 U19.8 | length 1.7
  Bottom Layer w0.2: R105.2@91.3,49 U19.8@92.995,49
NetR107_1: R107.1 U20.4 | length 1.7
  Bottom Layer w0.2: R107.1@107,69.3 107,69.8 107.3,70.1 U20.4@107.3,70.9
NetR119_2: R119.2 R120.2 U21.1 | length 2.9
  Bottom Layer w0.2: U21.1@114.6,50.1 R119.2@114.6,48.5 R120.2@115.9,48.5
NetR121_2: R121.2 U22.1 | length 2.3
  Top Layer w0.2: U22.1@22.205,33.4 R121.2@22.205,35.695
NetR124_2: R124.2 U24.1 | length 2.4
  Top Layer w0.2: U24.1@31.405,33.4 R124.2@31.405,35.795
NetR131_1: R131.1 U29.8 | length 2.2
  Top Layer w0.2: U29.8@112.795,37.7 R131.1@112.795,39.895
NetR132_1: R132.1 U29.7 | length 2.2
  Top Layer w0.2: U29.7@114.065,37.7 R132.1@114.065,39.865
NetR135_2: R135.2 U30.4 | length 3.2
  Top Layer w0.2: R135.2@97.5,22.4 97.5,23.1 98.3,23.9 U30.4@99.7,23.9
NetR136_1: R136.1 U31.8 | length 2.2
  Top Layer w0.2: U31.8@102.295,37.7 R136.1@102.295,39.895
NetR137_1: R137.1 U31.7 | length 2.2
  Top Layer w0.2: U31.7@103.565,37.7 R137.1@103.565,39.865
NetR141_1: R141.1 R142.2 U33.8 | length 4.7
  Bottom Layer w0.2: R141.1@97.405,149.805 U33.8@100,149.805 100,150.3 99.3,151 R142.2@99.3,151.6
NetR145_2: R145.2 R151.1 U33.1 | length 4.6
  Bottom Layer w0.2: U33.1@105.2,149.805 105.2,150.5 105.8,151.1 R145.2@105.8,151.6 ; U33.1@105.205,149.8 R151.1@107.8,149.8
NetR158_1: R158.1 R159.1 U26.4 | length 3.8
  Bottom Layer w0.2: U26.4@100.9,174.995 100.9,173.6 R159.1@101,173.5 102.5,172 R158.1@102.6,172
NetU5_6: U5.6 U6.4 | length 43.2
  Top Layer w0.2: U5.6@127.9,117.6 127.9,116.8 127.4,116.3 122.8,116.3 120.8,118.3 120.8,127.7 134.7,141.6 U6.4@134.7,146.827
NetU14_7: U14.7 U14.8 | length 2.9
  Top Layer w0.2: U14.8@57.9,157.9 56.7,157.9 56.7,158.4 U14.7@57.9,158.4
NetU28_2: U28.2 Y5.1 | length 5.4
  Top Layer w0.2: Y5.1@27,154.6 27.7,154.6 28.2,155.1 28.2,159.065 U28.2@28.165,159.1
OSC-IN: C98.2 U18.5 Y4.2 | length 16
  Bottom Layer w0.2: U18.5@110.75,61.05 112.484,61.05 113,61.566 113,62.2 115.4,64.6 C98.2@115.4,70.2 116.9,70.2 118.2,71.5 Y4.2@118.8,71.5
OSC-OUT: C99.2 U18.6 Y4.1 | length 9.8
  Bottom Layer w0.2: U18.6@110.75,60.55 112.55,60.55 113.4,61.4 113.4,62 114,62.6 C99.2@115.4,62.6 117.579,62.6 Y4.1@118.8,61.379
PA6: D23.2 U18.22 | length 32.5
  Top Layer w0.2: v1(126.6,45) D23.2@128.8,45
  Bottom Layer w0.2: U18.22@106.45,53.75 106.45,47.35 109.6,44.2 118,44.2 121.3,47.5 124.1,47.5 v1(126.6,45)
PA7: D24.2 U18.23 | length 35.2
  Top Layer w0.2: v1(126.6,42.5) D24.2@128.8,42.5
  Bottom Layer w0.2: U18.23@105.95,53.75 105.95,47.284 109.434,43.8 118.166,43.8 121.466,47.1 123.934,47.1 124.467,46.567 124.467,46.533 125.583,45.417 125.617,45.417 125.617,45.134 126.6,44.151 v1(126.6,42.5)
PWR-IN: C3.1 C4.2 C5.2 C6.2 C7.2 C8.1 L10.3 Q8. Q8.5 Q8.6 Q8.7 Q8.8 R23.2 R30.1 | length 43.1
  Bottom Layer w0.508: R23.2@150.7,84.4 154,84.4 ; 155.1,65.5 159.1,65.5 160.4,66.8 160.4,69.9 159.2,71.1 159.2,81.9 156.7,84.4 154,84.4 ; R30.1@157.8,90.8 157.8,91.6 157.3,92.1 154.7,92.1 154,91.4 154,84.4
  other v1: 149.8,47.1 149.8,47.8 149.8,48.5 149.8,49.2 144,51.1 144.9,51.1 145.8,51.1 146.7,51.1 147.6,51.1 148.5,51.1 149.4,51.1 144,52 144.9,52 145.8,52 146.7,52 147.6,52 148.5,52 149.4,52 144,53 144.9,53 145.8,53 146.7,53 147.6,53 148.5,53 149.4,53 144,53.9 144.9,53.9 145.8,53.9 146.7,53.9 147.6,53.9 148.5,53.9 149.4,53.9 144,54.8 144.9,54.8 145.8,54.8 146.7,54.8 147.6,54.8 148.5,54.8 149.4,54.8 144,55.7 144.9,55.7 145.8,55.7 146.7,55.7 147.6,55.7 148.5,55.7 149.4,55.7
PWR-LED: D18.2 U7.23 | length 70
  Top Layer w0.2: D18.2@108.366,182.661 108.366,184.1 109.166,184.9 150.551,184.9 151.151,185.5 v1(151.6,185.5) ; U7.23@147.1,166.3 147.2,166.2 v1(152.1,166.2)
  Bottom Layer w0.2: v1(151.6,185.5) 151.7,185.6 151.7,166.6 v1(152.1,166.2)
PWR-OPEN: R4.2 R157.1 U7.11 | length 60.2
  Top Layer w0.2: R157.1@142.8,102.5 142.9,102.6 v1(143.9,102.6) ; U7.11@147.1,154.3 147.1,153 148.1,152 148.1,150.9 v1(149.4,150.9)
  Bottom Layer w0.2: v1(143.9,102.6) 142.4,102.6 140.9,104.1 140.9,122.7 143.8,125.6 143.8,140.7 149.4,146.3 v1(149.4,150.9)
REC-ELD: D16.2 U7.21 | length 40.5
  Top Layer w0.2: v1(142,162.4) 144.2,162.4 145.3,163.5 U7.21@149.1,163.5
  Bottom Layer w0.2: D16.2@127.416,182.661 127.416,179.584 130.3,176.7 137.569,176.7 139.569,174.7 141.403,174.7 143.6,172.503 143.6,166.166 143.2,165.766 143.2,163.6 v1(142,162.4)
RESET: J4.4 R118.1 U18.7 U21.4 | length 35.2
  Top Layer w0.2: v1(113.2,60.1) 113.9,60.1 114.3,59.7 129.7,59.7 J4.4@131.04,58.36
  Bottom Layer w0.2: U21.4@112.6,53.1 111.814,53.1 107.8,57.114 107.8,59.2 108.65,60.05 U18.7@110.75,60.05 113.15,60.05 v1(113.2,60.1) ; J4.4@131.04,58.36 R118.1@133.36,58.36
REV: Q4.1 U10.2 | length 187.4
  Top Layer w0.2: U10.2@152.3,173.05 153.95,174.7 v1(161.8,174.7)
  Bottom Layer w0.2: Q4.1@149.168,6.635 149.2,6.667 149.2,9.5 150,10.3 151.2,10.3 151.8,10.9 151.8,30.3 152.9,31.4 157.466,31.4 162.2,36.134 162.2,172 162.4,172.2 162.4,174.1 v1(161.8,174.7)
REV-SIG: U7.30 U10.3 | length 14.3
  Top Layer w0.2: U7.30@141.5,166.3 141.5,167.4 142.4,168.3 142.4,172.5 142.95,173.05 U10.3@149.9,173.05
RS232-RXD: J11.2 U25.13 | length 33.3
  Top Layer w0.2: J11.2@6.883,9.981 3.319,9.981 2.2,11.1 2.2,30.1 2.6,30.5 7.366,30.5 9.21,32.344 U25.13@9.21,33.588
RS232-TXD: J11.1 U25.14 | length 35.9
  Top Layer w0.2: J11.1@6.883,6.981 3.719,6.981 1.8,8.9 1.8,30.3 2.4,30.9 7.2,30.9 7.94,31.64 U25.14@7.94,33.588
RS485-1_N: J11.6 U22.7 | length 22.6
  Top Layer w0.2: J11.6@12.883,9.981 11.6,11.264 11.6,13.734 20.5,22.634 20.5,26.557 20.935,26.992 U22.7@20.935,28.2
RS485-1_P: J11.5 U22.6 | length 25.8
  Top Layer w0.2: J11.5@12.883,6.981 11.2,8.664 11.2,13.9 20.1,22.8 20.1,26.557 19.665,26.992 U22.6@19.665,28.2
RS485-2_N: J11.8 R127.1 U24.7 | length 28.1
  Top Layer w0.2: J11.8@15.883,9.981 14.7,11.164 14.7,13.8 22.8,21.9 28.166,21.9 29.7,23.434 29.7,24.592 30.3,25.192 R127.1@30.3,25.8 ; R127.1@30.135,25.965 U24.7@30.135,28.2
RS485-2_P: J11.7 R126.1 U24.6 | length 31.3
  Top Layer w0.2: J11.7@15.883,6.981 14.3,8.564 14.3,13.966 22.634,22.3 28,22.3 29.3,23.6 29.3,24.592 28.7,25.192 R126.1@28.7,25.8 ; R126.1@28.865,25.965 U24.6@28.865,28.2
RST: U7.4 U11.2 | length 3.3
  Top Layer w0.2: U11.2@141.45,151 141.45,154.25 U7.4@141.5,154.3
RUN-LED: D17.2 U7.22 | length 62.1
  Top Layer w0.2: D17.2@113.128,182.661 113.128,184.228 113.4,184.5 v1(151,184.5) ; U7.22@149.1,164.3 v1(151.3,164.3)
  Bottom Layer w0.2: v1(151,184.5) 151.3,184.2 151.3,180.3 v1(151.3,164.3)
SD-LED: D15.2 U7.20 | length 37.5
  Top Layer w0.2: v1(142.4,161.6) 144.6,161.6 145.7,162.7 U7.20@149.1,162.7
  Bottom Layer w0.2: D15.2@132.179,182.661 132.179,178.2 133.279,177.1 137.734,177.1 139.734,175.1 141.569,175.1 144,172.669 144,166 143.6,165.6 143.6,162.8 v1(142.4,161.6)
SYS-RESET: U13.2 U17.2 U21.2 U27.2 | length 213.2
  Top Layer w0.2: v1@32,152.45 U27.2@39.5,152.45 ; v1(70.3,147.9) 70.9,147.3 72.066,147.3 79.734,139.631 79.734,126.297 91,115.031 91,71.9 91.2,71.7 91.2,64.6 101.9,53.9 109.1,53.9 110.3,52.7 110.3,50.375 112.575,48.1 v1(112.6,48.1)
  Bottom Layer w0.2: U17.2@31.95,143.8 v1(31.95,152.5) 31.95,154.531 33.7,156.281 33.7,164.9 38.1,169.3 61.8,169.3 63,168.1 64.1,168.1 ; U13.2@64.1,169.4 64.1,168.1 ; v1(70.3,147.9) 70.3,153.2 69.1,154.4 69.1,167.2 68.2,168.1 64.1,168.1 ; v1(112.6,48.1) 112.625,48.1 113.6,49.075 U21.2@113.6,50.1
TCK: J4.9 R117.1 U18.49 | length 41.8
  Top Layer w0.2: v1(101.1,66.6) 101.1,66 102,65.1 102,63.686 107.586,58.1 120.834,58.1 122.217,56.717 122.217,52.583 122.8,52 127.24,52 J4.9@128.5,50.74
  Bottom Layer w0.2: v1(101.1,66.6) 101.45,66.25 U18.49@101.45,64.85 ; R117.1@126.14,50.74 J4.9@128.5,50.74
TDI: J4.5 R111.1 U18.50 | length 36.5
  Top Layer w0.2: v1(102.4,66.6) 102.4,63.851 107.751,58.5 121,58.5 122.8,56.7 127.62,56.7 J4.5@128.5,55.82
  Bottom Layer w0.2: U18.50@101.95,64.85 101.95,66.15 v1(102.4,66.6) ; R111.1@126.12,55.82 J4.5@128.5,55.82
TDO: J4.6 R113.1 U18.55 | length 34.3
  Top Layer w0.2: v1(104.1,63) 104.1,62.951 108.151,58.9 121.2,58.9 123,57.1 129.76,57.1 J4.6@131.04,55.82
  Bottom Layer w0.2: v1(104.1,63) 104.1,63.2 104.45,63.55 U18.55@104.45,64.85 ; J4.6@131.04,55.82 R113.1@133.38,55.82
TMS: J4.7 R112.1 U18.46 | length 34.6
  Top Layer w0.2: v1(102.1,61.3) 103.82,61.3 107.42,57.7 120.669,57.7 121.817,56.551 121.817,55.117 v1(121.2,54.5)
  Bottom Layer w0.2: U18.46@99.65,62.05 101.35,62.05 v1(102.1,61.3) ; v1(121.2,54.5) 124.9,54.5 R112.1@126.1,53.3 126.12,53.28 J4.7@128.5,53.28
TRST: J4.3 R110.1 R118.2 U18.56 | length 37.6
  Top Layer w0.2: v1(104.9,63) 108.6,59.3 123.8,59.3 124.74,58.36 J4.3@128.5,58.36
  Bottom Layer w0.2: v1(104.9,63) 104.95,63.05 U18.56@104.95,64.85 ; R110.1@126.14,58.36 J4.3@128.5,58.36 129.84,59.7 134.2,59.7 135,58.9 R118.2@135,58.4
U1-RXD: R115.2 U18.43 | length 11
  Top Layer w0.2: v1(96.9,66.5) 96.9,65 v1(101.4,60.5)
  Bottom Layer w0.2: v1(96.9,66.5) R115.2@96.9,67.7 ; U18.43@99.65,60.55 v1@101.4,60.55 ; v1(101.4,60.5) v1@101.4,60.55 ; v1@101.4,60.55 101.45,60.55 101.4,60.6 v1@101.4,60.55
U1-TXD: R109.2 U18.42 | length 11
  Top Layer w0.2: v1(93.9,66.5) 93.9,64.2 97.8,60.3 v1(97.8,60.1)
  Bottom Layer w0.2: v1(93.9,66.5) R109.2@93.9,67.7 ; v1@97.85,60.05 U18.42@99.65,60.05
U2-RXD: R116.2 U18.17 | length 18.3
  Bottom Layer w0.2: R116.2@98.4,67.7 98.4,66.2 105.2,59.4 105.2,59.048 108.95,55.298 U18.17@108.95,53.75
U2-TXD: R114.2 U18.16 | length 26.1
  Top Layer w0.2: v1(95.4,66.5) 95.4,64.2 104.1,55.5 v1(112.6,55.5)
  Bottom Layer w0.2: v1(95.4,66.5) R114.2@95.4,67.7 ; U18.16@110.75,55.55 v1@112.55,55.55
UART0-RXD: M1.B16 U23.12 | length 107.9
  Top Layer w0.2: U23.12@41.812,180.58 43.92,180.58 v1(43.9,180.6)
  Bottom Layer w0.2: v1(43.9,180.6) 69.7,180.6 73.5,176.8 73.5,107.1 72.772,106.372 70.352,106.372 M1.B16@69.352,105.372
UART0-TXD: M1.B15 U23.11 | length 107.4
  Top Layer w0.2: U23.11@41.812,181.85 41.862,181.9 v1(43.9,181.9)
  Bottom Layer w0.2: v1(43.9,181.9) 44.3,181.9 45.2,181 69.866,181 73.9,176.966 73.9,106.934 72.338,105.372 M1.B15@71.352,105.372
UART2-RXD: M1.A35 M2.25 | length 181.6
  Top Layer w0.2: v1(6.7,115) 6.7,115.049 7.634,115.983 7.917,115.983 9.6,117.666 9.6,124.066 11.3,125.766 v1(11.3,138) ; v1(105.7,174.6) 105.7,174.066 108.4,171.366 M2.25@108.4,169
  Bottom Layer w0.2: M1.A35@2.3,99.2 2.3,99.3 3.2,100.2 3.886,100.2 6.4,100.2 7.1,100.9 7.1,113.5 6.7,113.9 v1(6.7,115) ; v1(11.3,138) 11.3,138.466 25.1,152.266 25.1,161.266 41.1,177.266 41.1,183.234 42.666,184.8 92.166,184.8 94.166,182.8 102.566,182.8 105,180.366 105,175.3 v1(105.7,174.6)
UART2-TXD: M1.A36 M2.26 | length 180.8
  Top Layer w0.2: v1(7.5,115) 10,117.5 10,123.9 11.7,125.6 11.7,137.5 v1(12.2,138) ; v1(104.6,174.6) 107.4,171.8 107.4,168 M2.26@108.4,167
  Bottom Layer w0.2: M1.A36@4.3,99.2 6.7,99.2 7.5,100 v1(7.5,115) ; v1(12.2,138) 12.2,138.8 25.5,152.1 25.5,161.1 41.5,177.1 41.5,183.069 42.731,184.3 84.751,184.3 84.851,184.4 92,184.4 94,182.4 102.4,182.4 104.6,180.2 v1(104.6,174.6)
UART3-RXD: M1.A33 R121.1 | length 89.9
  Top Layer w0.2: M1.A33@2.3,101.2 3.3,100.2 7,100.2 8.4,98.8 8.4,41.5 9.8,40.1 v1(10.9,40.1) ; R121.1@22.4,37.3 v1(22.4,38.4)
  Bottom Layer w0.2: v1(10.9,40.1) 16.6,40.1 17.4,39.3 17.4,34.3 17.9,33.8 21.9,33.8 22.4,34.3 v1(22.4,38.4)
UART3-TXD: M1.A34 U22.4 | length 79.5
  Top Layer w0.2: M1.A34@4.3,101.2 6.566,101.2 8.8,98.966 8.8,42.2 9.8,41.2 v1(10.9,41.2) ; U22.4@18.395,33.4 18.4,33.405 v1(18.4,35.6)
  Bottom Layer w0.2: v1(10.9,41.2) 17.5,41.2 18.4,40.3 v1(18.4,35.6)
UART4-RXD: U16.62 U25.9 | length 149.6
  Top Layer w0.2: U25.9@14.29,33.588 14.29,34.89 15.3,35.9 15.3,52.9 17.2,54.8 54.897,54.8 57.7,57.603 57.7,91.634 58.7,92.634 58.7,94.166 57.7,95.166 57.7,119.7 58.1,120.1 v1(58.1,121.8) ; v1(48,130.8) 48,126.028 51.066,122.963 56.8,122.963 57.337,123.5 v1(58.1,123.5)
  Bottom Layer w0.2: U16.62@45.85,130.45 47.65,130.45 v1(48,130.8) ; v1(58.1,121.8) v1(58.1,123.5)
UART4-TXD: U16.8 U25.10 | length 152.3
  Top Layer w0.2: U25.10@13.02,33.588 13.02,35.02 14.3,36.3 14.3,43.2 14.3,53.2 16.3,55.2 54.731,55.2 57.3,57.769 57.3,91.8 58.3,92.8 58.3,94 57.3,95 57.3,120.5 v1(57.5,120.7) ; v1(40.3,129.2) 40.2,129.2 40.5,129.5 42.266,129.5 50.466,121.3 53.151,121.3 53.751,120.7 v1(54.7,120.7)
  Bottom Layer w0.2: U16.8@40,127.1 40,128.751 40.3,129.051 v1(40.3,129.2) ; v1(54.7,120.7) v1(57.5,120.7)
UART5-RXD: U16.20 U25.12 | length 156.8
  Top Layer w0.2: U25.12@10.48,33.588 10.48,35.58 12.3,37.4 12.3,43.2 12.3,54.2 14.1,56 54.4,56 56.5,58.1 56.5,120.263 54.663,122.1 50.797,122.1 42.597,130.3 35.6,130.3 v1(35.4,130.5)
  Bottom Layer w0.2: U16.20@33.65,130.95 35.15,130.95 35.5,130.6 v1(35.4,130.5)
UART5-TXD: U16.10 U25.11 | length 154
  Top Layer w0.2: U25.11@11.75,33.588 11.75,35.15 13.3,36.7 13.3,43.2 13.3,53.6 15.3,55.6 54.566,55.6 56.9,57.934 v1(56.9,121.5) ; v1(38.6,129.3) 39.2,129.9 42.431,129.9 50.631,121.7 53.4,121.7 53.6,121.5 v1(53.8,121.5)
  Bottom Layer w0.2: v1(38.6,129.3) 38.9,129 38.9,128.951 39,128.851 U16.10@39,127.1 ; v1(53.8,121.5) v1(56.9,121.5)
UART6-RXD: R124.1 U16.29 | length 185
  Top Layer w0.2: R124.1@31.4,37.4 31.4,52.8 33,54.4 55.063,54.4 58.1,57.437 58.1,91.469 59.1,92.469 59.1,94.8 58.1,95.8 58.1,119.534 59.1,120.534 v1(59.1,121.8) ; v1(31.8,134.9) 31.8,137.8 37.2,143.2 49,143.2 v1(49.4,143.6)
  Bottom Layer w0.2: v1(31.8,134.9) 32.35,135.45 U16.29@33.65,135.45 ; v1(49.4,143.6) 52.7,143.6 56.6,139.7 59.2,139.7 60.3,140.8 60.3,143.7 61.9,145.3 65.7,145.3 67.5,143.5 67.5,139.8 62.9,135.2 62.9,125.2 61.2,123.5 60,123.5 59.1,122.6 v1(59.1,121.8)
UART6-TXD: R125.1 U16.39 | length 169
  Top Layer w0.2: R125.1@38.7,35.6 40.2,35.6 41.7,37.1 41.7,52.7 43,54 55.228,54 58.5,57.272 58.5,91.303 59.5,92.303 59.5,94.966 58.5,95.966 58.5,119.3 60,120.8 v1(60,121.8) 59.949,121.8 v1@59.9,121.751 ; v1(39.3,142) 40.1,142.8 50.1,142.8 50.9,143.6 v1(50.9,144.2)
  Bottom Layer w0.2: U16.39@39,139.3 39,140.9 39.3,141.2 v1(39.3,142) ; v1(50.9,144.2) 51.1,144 52.866,144 56.766,140.1 59.034,140.1 59.9,140.966 59.9,143.866 61.734,145.7 65.866,145.7 67.9,143.666 67.9,139.634 63.3,135.034 63.3,125.034 61.366,123.1 60.5,123.1 60,122.6 v1(60,121.8) ; v1@59.9,121.751 v1@59.967,121.819
UART7-RXD: R109.1 R114.1 U16.51 | length 128
  Top Layer w0.2: v1(48,140) 49.4,141.4 v1(58.2,141.4) ; v1(68.7,147.3) 68.8,147.3 69.2,146.9 71.9,146.9 79.334,139.466 79.334,126.131 90.6,114.866 v1(90.6,69.3)
  Bottom Layer w0.2: U16.51@45.85,135.95 44.35,135.95 44,136.3 44,137.6 46.4,140 v1(48,140) ; v1(58.2,141.4) 58.2,145.8 59.3,146.9 68.3,146.9 v1(68.7,147.3) ; v1(90.6,69.3) R109.1@93.9,69.3 R114.1@95.3,69.3
UART7-TXD: R115.1 R116.1 U16.41 | length 131.4
  Top Layer w0.2: v1(40,140.8) 41.4,142.2 v1(59,142.2) ; v1(68.7,146.1) 68.8,146.1 69.2,146.5 71.734,146.5 78.934,139.3 78.934,125.966 90.2,114.7 90.2,70.8 90.1,70.7 v1(90,70.8)
  Bottom Layer w0.2: U16.41@40,139.3 v1(40,140.8) ; v1(59,142.2) 58.6,142.6 58.6,145.634 59.466,146.5 68.3,146.5 v1(68.7,146.1) ; v1(90,70.8) 90.1,70.7 96.4,70.7 96.9,70.2 R115.1@96.9,69.3 R116.1@98.1,69.3
UART-RST: U16.27 U17.4 | length 10.6
  Bottom Layer w0.2: U17.4@32.9,140.8 32.9,139.6 36.6,135.9 36.6,134.8 36.25,134.45 U16.27@33.65,134.45